# Altium PCB PCB1.PcbDoc (part 2 of 3)
Units mm, origin at the board's own origin, x right, y up, seen from the top; angles counter-clockwise.
Board outline 44.87 x 32.17 mm, 6 copper layers (Top Side, Inner Layer 1(GND), Inner Layer 2, Inner Layer 3, Inner Layer 4(GND), Bottom Side), stack 1.618 mm thick; 40 components, 39 nets, 233 pads, 118 vias.
Unrouted connection lines stored in the file: 1.
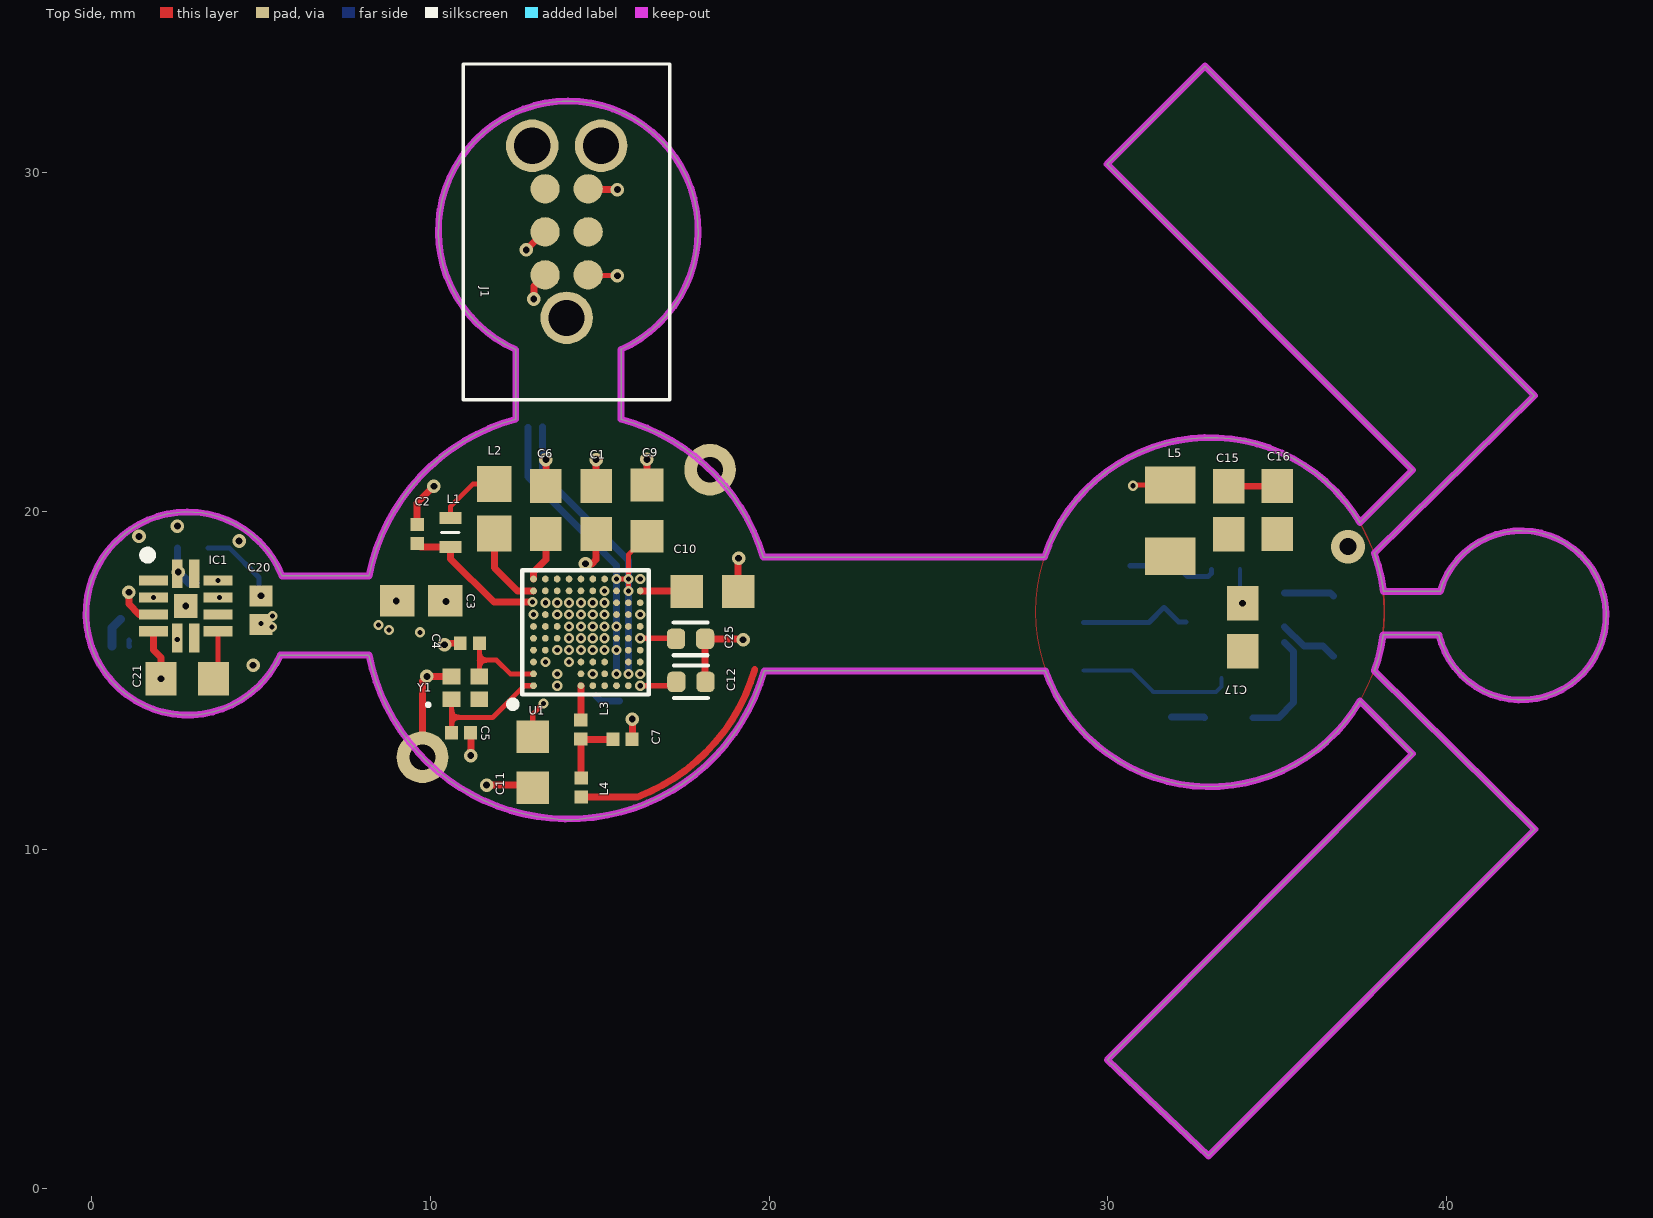
[diagram p0: Top Side view]

## Part data (continued)
L1: library part LQG15HN15NJ02D, "Inductor RF Chip Multi-Layer 15nH 5% 100MHz 8Q-Factor Air 300mA 460mOhm DCR 0402 Paper T/R", Case Code (Imperial)=0402, Case Code (Metric)=1005, Current Rating=300mA, DC Resistance (DCR)=460mR, Inductance Tolerance=5%, Manufacturer=Murata, Max Operating Temperature=125°C, Min Operating Temperature=-55°C, Package Quantity=1, Self Resonant Frequency=2.3GHz, Test Frequency=100MHz, Case/Package=0402, Category="Fixed Inductors", ComponentLink1Description=https://datasheet.ciiva.com/11801/0900766b80f10808-11801397.pdf?src-supplier=RSComponents, ComponentLink1URL=https://datasheet.ciiva.com/11801/0900766b80f10808-11801397.pdf?src-supplier=RSComponents, ComponentLink2Description=https://datasheet.ciiva.com/29696/l0075s0083lqg15hn-29696703.pdf?src-supplier=Digi-Key, ComponentLink2URL=https://datasheet.ciiva.com/29696/l0075s0083lqg15hn-29696703.pdf?src-supplier=Digi-Key, ComponentLink3Description=https://datasheet.ciiva.com/17277/l0075s0083lqg15hn-17277465.pdf?src-supplier=Avnet+Europe, ComponentLink3URL=https://datasheet.ciiva.com/17277/l0075s0083lqg15hn-17277465.pdf?src-supplier=Avnet+Europe, ComponentLink4Description=https://datasheet.ciiva.com/8002/66026-8002488.pdf?src-supplier=Element14, ComponentLink4URL=https://datasheet.ciiva.com/8002/66026-8002488.pdf?src-supplier=Element14, ComponentLink5Description=https://datasheet.ciiva.com/1063/l0075s0083lqg15hn-1063850.pdf?src-supplier=Digi-Key, ComponentLink5URL=https://datasheet.ciiva.com/1063/l0075s0083lqg15hn-1063850.pdf?src-supplier=Digi-Key, ComponentLink6Description=https://datasheet.ciiva.com/29696/l0075s0083lqg15hn-29696702.pdf?src-supplier=Digi-Key, ComponentLink6URL=https://datasheet.ciiva.com/29696/l0075s0083lqg15hn-29696702.pdf?src-supplier=Digi-Key, Core Material=Air, DC Current=300mA, Depth=0.55mm, Height=0.5mm, Height - Seated (Max)=0.022inch, Inductance=15nH, Lead Free="Lead Free", Length=0.039inch, Manufacturer Part Number=LQG15HN15NJ02D, Max DC Current=300mA, Military Standard=Not, Mount="Surface Mount", Packaging="Tape and Reel", Pricing 1="1=0.10000, 10=0.05500, 25=0.04920, 50=0.04180, 100=0.03690, 250=0.03380, 500=0.03072, 1000=0.02580, 2500=0.02211 (USD)", Q Factor=8, Radiation Hardening=No, REACH SVHC="No SVHC", RoHS=Yes, Shielding=Unshielded, Stock 1=62568, Supplier 1=Digi-Key, Termination=SMD/SMT, Tolerance=5%, Width=0.5mm
L2: library part LBMF1608T100K, "Inductor Chip Wirewound 10uH 10% 2.52MHz Ferrite 80mA 468mOhm DCR 0603 T/R", Case Code (Imperial)=0603, Case Code (Metric)=1608, Current Rating=80mA, DC Resistance (DCR)=360mR, Inductance Tolerance=10%, Manufacturer="Taiyo Yuden", Max Operating Temperature=105°C, Min Operating Temperature=-40°C, Package Quantity=3000, Resistor Type=Wirewound, Self Resonant Frequency=32MHz, Test Frequency=2.52MHz, Case/Package=0603, Category="Fixed Inductors", ComponentLink1Description=https://datasheet.ciiva.com/8504/lbmf1608t100k-ss-8504740.pdf?src-supplier=Avnet, ComponentLink1URL=https://datasheet.ciiva.com/8504/lbmf1608t100k-ss-8504740.pdf?src-supplier=Avnet, ComponentLink2Description=https://datasheet.ciiva.com/26872/getdatasheetpartid-637440-26872437.pdf?src-supplier=Verical, ComponentLink2URL=https://datasheet.ciiva.com/26872/getdatasheetpartid-637440-26872437.pdf?src-supplier=Verical, ComponentLink3Description=https://datasheet.ciiva.com/1040/lbmf1608t100k-ss-1040360.pdf?src-supplier=Digi-Key, ComponentLink3URL=https://datasheet.ciiva.com/1040/lbmf1608t100k-ss-1040360.pdf?src-supplier=Digi-Key, ComponentLink4Description=https://datasheet.ciiva.com/15986/610lbmf1608t100k-15986589.pdf?src-supplier=Onlinecomponents.com, ComponentLink4URL=https://datasheet.ciiva.com/15986/610lbmf1608t100k-15986589.pdf?src-supplier=Onlinecomponents.com, ComponentLink5Description=https://datasheet.ciiva.com/46395/1497259-46395174.pdf?src-supplier=Element14, ComponentLink5URL=https://datasheet.ciiva.com/46395/1497259-46395174.pdf?src-supplier=Element14, Core Material=Ferrite, DC Current=80mA, Depth=0.9mm, Halogen Free="Halogen Free", Height=0.35mm, Height - Seated (Max)=0.039inch, Inductance=10uH, Lead Free="Lead Free", Lead Pitch=0.7mm, Length=0.063inch, Manufacturer Part Number=LBMF1608T100K, Max DC Current=80mA, Military Standard=Not, Mount="Surface Mount", Packaging="Tape and Reel", Pricing 1="1=0.25000, 10=0.22300, 25=0.19800, 50=0.16840, 100=0.14850, 250=0.13612, 500=0.12376, 1000=0.10395 (USD)", Radiation Hardening=No, REACH SVHC=Unknown, RoHS=Yes, RoHS Compliant=Yes, Series=LB, Shielding=Unshielded, Stock 1=5221, Supplier 1=Digi-Key, Termination=SMD/SMT, Tolerance=10%, Weight=7.1E-05oz, Width=0.031inch
L3: library part LQP03TN3N9B02D, "Inductor RF Chip Thin Film 3.9nH 0.1nH 500MHz 14Q-Factor 400mA 300mOhm DCR 0201 Paper T/R", Case Code (Imperial)=0201, Case Code (Metric)=0603, Current=250mA, Current Rating=400mA, DC Resistance (DCR)=300mR, Manufacturer=Murata, Max Operating Temperature=125°C, Min Operating Temperature=-55°C, Package Quantity=15000, Resistor Type="Thin Film", Self Resonant Frequency=5.7GHz, Test Frequency=500MHz, Tolerance=3%, Case/Package=0201, Category="Fixed Inductors", ComponentLink1Description=https://datasheet.ciiva.com/16444/l0075s0084lqp03tn-02-16444482.pdf?src-supplier=Future+Electronics, ComponentLink1URL=https://datasheet.ciiva.com/16444/l0075s0084lqp03tn-02-16444482.pdf?src-supplier=Future+Electronics, Core Material=Non-Magnetic, DC Current=400mA, Depth=0.33mm, Height=0.3mm, Height - Seated (Max)=0.013inch, Inductance=3.9nH, Lead Free="Lead Free", Length=0.6mm, Manufacturer Part Number=LQP03TN3N9B02D, Max DC Current=400mA, Military Standard=Not, Mount="Surface Mount", Packaging="Tape and Reel", Pricing 1="1=0.10000, 10=0.04700, 25=0.04240, 50=0.03780, 100=0.03210, 250=0.02836, 500=0.02598, 1000=0.02221, 2500=0.01984 (USD)", Q Factor=14, Radiation Hardening=No, REACH SVHC="No SVHC", RoHS=Yes, Shielding=Unshielded, Stock 1=117865, Supplier 1=Digi-Key, Termination=SMD/SMT, Width=0.012inch
L4: library part LQP03TN4N7H02D, "Inductor RF Chip Thin Film 4.7nH 3% 500MHz 14Q-Factor 350mA 400mOhm DCR 0201 Paper T/R", Case Code (Imperial)=0201, Case Code (Metric)=0603, Current Rating=350mA, DC Resistance (DCR)=400mR, Manufacturer=Murata, Max Operating Temperature=125°C, Min Operating Temperature=-55°C, Package=None, Package Quantity=15000, Resistor Type="Thin Film", Self Resonant Frequency=4.4GHz, Test Frequency=500MHz, Tolerance=3%, Availability=Unavailable, Case/Package=0201, Category="Fixed Inductors", ComponentLink1Description=https://datasheet.ciiva.com/4982/s0084e-125392-4982064.pdf?src-supplier=Mouser, ComponentLink1URL=https://datasheet.ciiva.com/4982/s0084e-125392-4982064.pdf?src-supplier=Mouser, ComponentLink2Description=https://datasheet.ciiva.com/3865/lqp03tn4n7h0223-3865631.pdf?src-supplier=Arrow+Electronics, ComponentLink2URL=https://datasheet.ciiva.com/3865/lqp03tn4n7h0223-3865631.pdf?src-supplier=Arrow+Electronics, ComponentLink3Description=https://datasheet.ciiva.com/29698/s0084e-29698453.pdf?src-supplier=Digi-Key, ComponentLink3URL=https://datasheet.ciiva.com/29698/s0084e-29698453.pdf?src-supplier=Digi-Key, ComponentLink4Description=https://datasheet.ciiva.com/29698/s0084e-29698454.pdf?src-supplier=Digi-Key, ComponentLink4URL=https://datasheet.ciiva.com/29698/s0084e-29698454.pdf?src-supplier=Digi-Key, Core Material=Non-Magnetic, DC Current=350mA, Depth=0.33mm, Height=0.3mm, Height - Seated (Max)=0.013inch, Inductance=4.7nH, Lead Free="Lead Free", Length=0.024inch, Manufacturer Part Number=LQP03TN4N7H02D, Max DC Current=350mA, MF="{'manufacturer': u'Murata'}", Military Standard=Not, Mount="Surface Mount", Packaging="Tape and Reel", Price=None, Pricing 1="1=0.10000, 10=0.04700, 25=0.04240, 50=0.03780, 100=0.03210, 250=0.02836, 500=0.02598, 1000=0.02221, 2500=0.01984 (USD)", Q Factor=14, Radiation Hardening=No, RoHS=Yes, RoHS Compliant=Yes, Series=LQP03TN_02, Shielding=Unshielded, Stock 1=240787, Supplier 1=Digi-Key, Technology="THIN FILM", Termination=SMD/SMT, Width=0.3mm
L5: library part B82498F1472J000, "FIXED IND 4.7UH 90MA 3.8 OHM SMD", Case Code (Imperial)=0805, Case Code (Metric)=2012, Current Rating=90mA, DC Resistance (DCR)=3.8R, Inductance Tolerance=5%, Inductor Type="HIGH FREQUENCY", Manufacturer="TDK EPCOS", Self Resonant Frequency=210MHz, Test Frequency=7.96MHz, Case/Package=0805, Category="Fixed Inductors", ComponentLink1Description=https://datasheet.ciiva.com/6007/78409-6007765.pdf?src-supplier=Farnell, ComponentLink1URL=https://datasheet.ciiva.com/6007/78409-6007765.pdf?src-supplier=Farnell, ComponentLink2Description=https://datasheet.ciiva.com/14124/pjb82498f-data-en-14124805.pdf?src-supplier=Distrelec, ComponentLink2URL=https://datasheet.ciiva.com/14124/pjb82498f-data-en-14124805.pdf?src-supplier=Distrelec, Contact Plating=Silver, Core Material=Ferrite,Ceramic, DC Current=90mA, Depth=1.7mm, Inductance=4.7uH, Length=2.3mm, Manufacturer Part Number=B82498F1472J000, Max DC Current=90mA, Military Standard=Not, Mount="Surface Mount", Number of Pins=2, Packaging="Tape and Reel", Pricing 1="10=0.93100, 50=0.79000, 100=0.69900, 250=0.60400, 500=0.55800 (USD)", Q Factor=20, REACH SVHC="No SVHC", RoHS=Yes, RoHS Compliant=Yes, Series=SIMID, Series Resistance=3.8R, Stock 1=1, Supplier 1=RSComponents, Tolerance=5%
L6: library part AISC-0805F-470G-T, "Inductor RF Wirewound 47uH 2% 2.5MHz 10Q-Factor Ferrite 0.055A 13.8Ohm DCR 0805 T/R", Case Code (Imperial)=0805, Case Code (Metric)=2012, Current Rating=55mA, DC Resistance (DCR)=13.8R, Manufacturer=Abracon, Max DC Current=1A, Max Operating Temperature=125°C, Min Operating Temperature=-40°C, Package Quantity=2000, Self Resonant Frequency=14MHz, Test Frequency=2.5MHz, Tolerance=2%, Case/Package=0805, Category="Fixed Inductors", ComponentLink1Description=https://datasheet.ciiva.com/1079/aisc-0805f-1079476.pdf?src-supplier=Digi-Key, ComponentLink1URL=https://datasheet.ciiva.com/1079/aisc-0805f-1079476.pdf?src-supplier=Digi-Key, ComponentLink2Description=https://datasheet.ciiva.com/1079/aisc-0805f-1079477.pdf?src-supplier=Digi-Key, ComponentLink2URL=https://datasheet.ciiva.com/1079/aisc-0805f-1079477.pdf?src-supplier=Digi-Key, Core Material=Ferrite, Height=0.061inch, Inductance=47uH, Length=0.09inch, Manufacturer Part Number=AISC-0805F-470G-T, Mount="Surface Mount", Packaging="Tape and Reel", Pricing 1="1=0.29000, 10=0.25700, 25=0.22520, 50=0.19300, 100=0.17690, 250=0.16080, 500=0.15116, 1000=0.11578 (USD)", Q Factor=10, RoHS=Yes, RoHS Compliant=Yes, Series=AISC-0805F, Shielding=Unshielded, Stock 1=1780, Supplier 1=Digi-Key, Termination=SMD/SMT, Width=0.068inch
U1: "Multi-protocol Bluetooth Low Energy, IEEE 802.15.4, ANT and 2.4GHz proprietary system-on-chip", Manufacturer="Nordic Semiconductor", Manufacturer Part Number=nRF52840-CKAAD0, Footprint Doc=WLCSP-94, LatestRevisionDate=2018-12-17, Part Number=nRF52840-CKAAD0, Pin Count=94, Published=2018-12-17, Publisher="Nordic Semiconductor"
U2: library part SS8400-Legacy
U3: library part LM20DD9, "Ultra-low current 2.4 V precision analog temperature sensor", Manufacturer=STMicroelectronics, Max Operating Temperature=85°C, Max Supply Voltage=5.5V, Min Operating Temperature=-40°C, Min Supply Voltage=2.4V, Nominal Supply Current=8uA, Output Current=10mA, Output Voltage=1.864V, Package Quantity=1, Category="Temperature and Humidity Sensors", ComponentLink1Description=https://datasheet.ciiva.com/5299/cd00119601-113824-5299651.pdf?src-supplier=Mouser, ComponentLink1URL=https://datasheet.ciiva.com/5299/cd00119601-113824-5299651.pdf?src-supplier=Mouser, ComponentLink2Description=https://datasheet.ciiva.com/15098/getdatasheetpartid-130260-15098244.pdf?src-supplier=Verical, ComponentLink2URL=https://datasheet.ciiva.com/15098/getdatasheetpartid-130260-15098244.pdf?src-supplier=Verical, ComponentLink3Description=https://datasheet.ciiva.com/2847/cd00119601-2847250.pdf?src-supplier=Digi-Key, ComponentLink3URL=https://datasheet.ciiva.com/2847/cd00119601-2847250.pdf?src-supplier=Digi-Key, ComponentLink4Description=https://datasheet.ciiva.com/2847/cd00119601-2847251.pdf?src-supplier=Digi-Key, ComponentLink4URL=https://datasheet.ciiva.com/2847/cd00119601-2847251.pdf?src-supplier=Digi-Key, ComponentLink5Description=https://datasheet.ciiva.com/2847/cd00119601-2847252.pdf?src-supplier=Digi-Key, ComponentLink5URL=https://datasheet.ciiva.com/2847/cd00119601-2847252.pdf?src-supplier=Digi-Key, ComponentLink6Description=https://datasheet.ciiva.com/22623/1455553-22623973.pdf?src-supplier=Farnell, ComponentLink6URL=https://datasheet.ciiva.com/22623/1455553-22623973.pdf?src-supplier=Farnell, ComponentLink7Description=https://datasheet.ciiva.com/3279/cd00119601-3279974.pdf?src-supplier=Avnet, ComponentLink7URL=https://datasheet.ciiva.com/3279/cd00119601-3279974.pdf?src-supplier=Avnet, Height=0.48mm, Lead Free="Lead Free", Length=1.3mm, Manufacturer Part Number=STLM20DD9F, Max Supply Voltage (DC)=5.5V, Min Supply Voltage (DC)=2.4V, Mount="Surface Mount", Number of Pins=4, Operating Supply Current=8uA, Output Type="Analog Voltage,Analog", Packaging="Tape and Reel", Pricing 1="1=0.86000, 10=0.75800, 25=0.71240, 100=0.58150, 500=0.45968, 1000=0.38308 (USD)", Radiation Hardening=No, REACH SVHC="No SVHC", RoHS=Yes, RoHS Compliant=Yes, Series=STLM20, Stock 1=14696, Supplier 1=Digi-Key, Supply Current=8uA, Termination=SMD/SMT, Width=1mm
U5: "AP7340 Series 3.3 V Fixed Output 150 mA SMT LDO Regulator - DFN1010-4", Case/Package=DFN, Dropout Voltage=210mV, Manufacturer=Diodes, Max Input Voltage=5.25V, Max Operating Temperature=85°C, Max Output Current=150mA, Max Power Dissipation=400mW, Min Input Voltage=1.7V, Min Operating Temperature=-40°C, Output Voltage=3.3V, Package Quantity=5000, Quiescent Current=50uA, Accuracy=1%, Category="Voltage Regulators - Linear", ComponentLink1Description=https://datasheet.ciiva.com/29568/ap7340-29568831.pdf?src-supplier=Digi-Key, ComponentLink1URL=https://datasheet.ciiva.com/29568/ap7340-29568831.pdf?src-supplier=Digi-Key, ComponentLink2Description=https://datasheet.ciiva.com/30016/ap7340-30016698.pdf?src-supplier=Avnet, ComponentLink2URL=https://datasheet.ciiva.com/30016/ap7340-30016698.pdf?src-supplier=Avnet, Contact Plating=Gold, Height=0.35mm, Lead Free="Lead Free", Length=1.05mm, Manufacturer Part Number=AP7340-33FS4-7, Mount="Surface Mount", Number Of Outputs=1, Number of Pins=4, Number of Regulators=1, Output Current=150mA, Output Type=Fixed, Packaging="Tape and Reel", Polarity=Positive, Power Rating=400mW, Pricing 1="1=0.39000, 10=0.31400, 25=0.28720, 100=0.21370, 250=0.19368, 500=0.16028, 1000=0.12020, 2500=0.11019 (USD)", RoHS=Yes, RoHS Compliant=Yes, Stock 1=94687, Supplier 1=Digi-Key, Width=1.05mm
Y1: library part ECS-320-10-48-CKY-TR, "Crystal 32MHz ±10ppm (Tol) ±10ppm (Stability) 10pF 100Ohm 4-Pin Ultra Mini-CSMD T/R", Manufacturer="ECS International", ComponentLink1Description=https://www.ecsxtal.com/store/pdf/ECX-1048.pdf?src-supplier=Digi-Key, ComponentLink1URL=https://www.ecsxtal.com/store/pdf/ECX-1048.pdf?src-supplier=Digi-Key, Manufacturer Part Number=ECS-320-10-48-CKY-TR, Pricing 1="1=1.27000, 10=1.20000, 50=1.20000, 100=1.03000, 500=0.99300, 1000=0.83700, 3000=0.82100, 10000=0.82100 (USD)", RoHS=Yes, Stock 1=7614, Supplier 1=Mouser

## Free pads (board coordinates)
  round 1.524 hole 0.762 mask+0.102: 4(9.766,12.733)
  round 1.524 hole 0.762 paste+0: 4(18.255,21.222)

## Via types
v1: diameter 0.3, hole 0.15, Top Side to Inner Layer 1(GND), 24 vias
v2: diameter 0.4, hole 0.2, Top Side to Inner Layer 1(GND), tented both sides, 13 vias
v3: diameter 0.3, hole 0.15, Inner Layer 4(GND) to Bottom Side, tented both sides, 10 vias
v4: diameter 0.4, hole 0.2, Top Side to Bottom Side, tented both sides, 8 vias
v5: diameter 0.3, hole 0.15, Top Side to Inner Layer 3, 8 vias
v6: diameter 0.3, hole 0.15, Top Side to Inner Layer 2, 8 vias
v7: diameter 0.3/0.3 (per signal layer), hole 0.15, Top Side to Inner Layer 2, 6 vias
v8: diameter 0.4, hole 0.2, Inner Layer 4(GND) to Bottom Side, 6 vias
v9: diameter 0.3, hole 0.15, Top Side to Inner Layer 2, tented both sides, 5 vias
v10: diameter 0.3, hole 0.15, Inner Layer 2 to Bottom Side, tented both sides, 4 vias
v11: diameter 0.4, hole 0.2, Top Side to Inner Layer 1(GND), 3 vias
v12: diameter 0.3, hole 0.15, Inner Layer 3 to Bottom Side, tented both sides, 3 vias
v13: diameter 0.4/0.4 (per signal layer), hole 0.2, Top Side to Inner Layer 2, tented both sides, 3 vias
v14: diameter 0.3, hole 0.15, Top Side to Bottom Side, tented both sides, 2 vias
v15: diameter 0.3, hole 0.15, Top Side to Bottom Side, 2 vias
v16: diameter 0.4, hole 0.2, Inner Layer 3 to Bottom Side, tented both sides, 2 vias
v17: diameter 0.4, hole 0.2, Inner Layer 2 to Bottom Side, 2 vias
v18: diameter 0.3, hole 0.15, Top Side to Inner Layer 3, tented both sides, 1 vias
v19: diameter 0.762, hole 0.254, Inner Layer 2 to Inner Layer 3, 1 vias
v20: diameter 1, hole 0.5, Top Side to Bottom Side, tented both sides, 1 vias
v21: diameter 1, hole 0.5, Inner Layer 2 to Bottom Side, tented both sides, 1 vias
v22: diameter 0.4/0.4 (per signal layer), hole 0.2, Inner Layer 3 to Bottom Side, 1 vias
v23: diameter 0.3, hole 0.15, Inner Layer 4(GND) to Bottom Side, 1 vias
v24: diameter 0.4, hole 0.2, Inner Layer 4(GND) to Bottom Side, tented both sides, 1 vias
v25: diameter 0.3/0.3 (per signal layer), hole 0.15, Top Side to Inner Layer 2, tented both sides, 1 vias
v26: diameter 0.4, hole 0.2, Top Side to Inner Layer 3, 1 vias

## Nets (pads, with @x,y where several pads share a name; then routed paths per layer and width w, separated by ;. In a path a pad name is that pad's centre, name@x,y a point inside that pad or via, vN(x,y) a via of type N, cw(c..) or ccw(c..) an arc to the next point about the centre after c; other vN are vias at no path point)
3V3: C9.2 C11.2 C12.1 C13.1 C14.2 C24.2 C25.1 C26.2 J1.1 L5.1 U1.B3 U1.H10 U1.J9 U1.J10 U1.K1 U1.K5 U2.4 U5.1 | length 10.8
  Top Side w0.15: C11.2 13.021,14 v25(13.338,14.317) ; J1.1 14.681,26.949 v13(15.519,26.949) ; v6(15.493,17.995) v7(15.843,17.995) ; v7(15.843,17.645) v7(15.843,17.995) ; v7(16.193,14.845) 17.145,14.845 C12.1 ; v7(16.193,16.245) 17.233,16.245 C25.1 ; C9.2 15.843,18.712 v7(15.843,17.995) ; v7(30.743,20.749) 30.761,20.767 L5.1
  Bottom Side w0.15: C14.2 C13.1 31.211,16.713 v22(31.656,17.158) 32.087,16.728 U2.4
  other v15: 13.393,15.545
  other v16: 4.941,16.795 3.425,19.533
Antenna: L4.2 | length 7
  Top Side w0.203: L4.2 16.092,11.555 ccw(c14.075,16.914) 19.574,15.322
B57153S0150M000: IC1.1
GND: C1.1 C2.1 C3.2 C4.2 C5.1 C6.2 C7.1 C8.1 C9.1 C10.1 C11.1 C12.2 C18.2 C19.2 C20.1 C21.1 C22.2 C23.1 C25.2 C26.1 IC1.4 IC1.13 IC2.2 IC2.5 J1.5 J1.7 J1.8 J1.9 pad.4@9.766,12.733 U1.B7 U1.C1 U1.C4 U1.D3 U1.D4 U1.D5 U1.D6 U1.D7 U1.D8 U1.E4 U1.E5 U1.E6 U1.E7 U1.E8 U1.F4 U1.F5 U1.F6 U1.F7 U1.F8 U1.G4 U1.G5 U1.G6 U1.G7 U1.G8 U1.K10 U2.1 U2.5 U2.6 U2.7 U2.20 U2.21 U2.26 U2.30 U3.2 U3.3 U5.5 Y1.4 | length 18.8
  Top Side w0.203: IC1.4 1.826,15.9 2.05,15.675 v11(2.05,15.048) ; C2.1 9.607,20.238 v2(10.103,20.734) ; pad.4@9.766,12.733 9.766,14.988 v2(9.897,15.118) 9.9,15.115 Y1.4 ; v2(10.415,16.053) 10.444,16.053 10.49,16.099 C4.2 ; C5.1 11.192,13.455 v2(11.192,12.781) ; v2(11.659,11.913) 12.942,11.913 C11.1 ; C6.2 13.37,20.78 13.41,20.82 v2(13.41,21.52) ; J1.5 14.681,29.489 v2(15.519,29.489) ; C1.1 14.866,20.764 14.891,20.789 v2(14.891,21.52) ; C7.1 15.96,13.266 v2(15.96,13.861) ; C9.1 v2(16.391,21.526) ; C12.2 18.109,14.972 C25.2 19.204,16.229 v2(19.228,16.205) ; C10.1 19.08,18.588 v2(19.097,18.605)
  Top Side w0.254: C21.1@1.826,15.273 v11(2.05,15.048)
  Bottom Side w0.203: C8.1 15.042,14.395 v24(15.586,14.395) ; v23(31.871,13.923) 32.831,13.923 C18.2
  Bottom Side w0.254: IC2.2 0.6,16.556 v8(0.85,16.806)
  other v1: 13.743,14.845 14.093,15.545 13.743,15.895 14.093,15.895 14.443,15.895 14.793,15.895 15.143,15.895 14.093,16.245 14.443,16.245 14.793,16.245 15.143,16.245 14.093,16.595 14.443,16.595 14.793,16.595 15.143,16.595 14.093,16.945 14.443,16.945 14.793,16.945 15.143,16.945 14.093,17.295 14.443,17.295 14.793,17.295 15.143,17.295 16.193,17.995
  other v2: 8.99,17.348
  other v3: 32.294,15.906 32.3,16.185 32.3,16.447 35.215,16.835 35.215,17.085 29.345,17.837 30.645,17.837 32.3,17.835 33.352,18.281 34.404,18.281
  other v5: 13.743,14.845
  other v8: 13.491,16.387 2.601,16.768 3.941,17.882 1.397,18.691 2.98,19.232
  other v11: 2.776,17.201 5,17.5
NetC1_2: C1.2 C2.2 L1.1 U1.A8 U1.C2 | length 11.1
  Top Side w0.203: C2.2 9.704,18.943 L1.1 10.588,18.59 10.594,18.59 11.872,17.312 v7(13.013,17.312) ; v4(14.578,18.442) 14.768,18.442 14.891,18.565 C1.2
  Inner Layer 3 w0.203: v5(13.743,15.195) 14.578,16.03 14.578,17.42 v4(14.578,18.442)
  Inner Layer 2 w0.203: v7(13.013,17.312) 14.143,18.442 v4(14.578,18.442)
NetC3_1: C3.1 U1.B8 | length 3
  Top Side w0.15: C3.1 v26(10.456,17.329)
  Inner Layer 3 w0.15: v26(10.456,17.329) 13.359,17.329 v5(13.393,17.295)
  Inner Layer 2 w0.15: v5@13.359,17.329 v5(13.393,17.295)
NetC4_1: C4.1 U1.A2 Y1.3 | length 2.8
  Top Side w0.15: Y1.3 11.443,15.6 ; C4.1 11.443,15.6 ; U1.A2 12.358,15.195 11.953,15.6 11.443,15.6
NetC5_2: C5.2 U1.A1 Y1.1 | length 3.8
  Top Side w0.15: C5.2 10.623,13.91 ; Y1.1 10.623,13.91 ; U1.A1 12.773,14.845 11.838,13.91 10.623,13.91
NetC6_1: C6.1 U1.A10 | length 1.5
  Top Side w0.203: U1.A10 13.043,18.197 13.41,18.565 C6.1
NetC7_2: C7.2 L3.2 L4.1 | length 2.1
  Top Side w0.203: L4.1 14.443,12.121 L3.2 14.456,13.259 C7.2
NetC8_2: C8.2 U1.F2
  other v15: 14.793,15.195
NetC10_2: C10.2 U1.K9 | length 1.4
  Top Side w0.203: U1.K9 17.546,17.645 C10.2
NetC17_1: C17.1 U2.28 | length 1
  Bottom Side w0.125: U2.28 33.902,17.352 v4(33.973,17.281)
NetC18_1: C18.1 U2.18 | length 3.3
  Bottom Side w0.203: C18.1 35.029,13.899 35.477,14.346 35.477,15.856 U2.18
NetC21_2: C21.2 IC1.7 | length 1.5
  Top Side w0.15: C21.2 3.726,15.174 IC1.7
NetC24_1: C24.1 U5.2 | length 2.6
  Bottom Side w0.15: U5.2 4.073,18.907 4.941,18.039 C24.1
NetL1_2: L1.2 L2.1 | length 1.9
  Top Side w0.15: L1.2 10.588,20.13 11.252,20.794 L2.1
NetL2_2: L2.2 U1.A9 | length 2.4
  Top Side w0.203: L2.2 11.887,18.327 12.569,17.645 U1.A9
NetL3_1: L3.1 U1.E1 | length 1
  Top Side w0.203: L3.1 U1.E1
NetL6_1: L6.1 U2.23 | length 1.5
  Bottom Side w0.203: U2.23 36.563,17.585 L6.1
NetU2_31: U2.31 U3.1 | length 2.7
  Bottom Side w0.15: U3.1 32.029,18.387 32.352,18.064 32.952,18.064 33.052,18.165 U2.31
P0.29/AIN5: IC1.10 U1.C7 | length 10.7
  Inner Layer 3 w0.203: v5(3.726,17.951) 3.895,17.782 5.583,17.782 5.621,17.782 ; 8.186,17.782 13.343,17.782 13.743,17.383 v5(13.743,16.945)
  Inner Layer 3 w0.254: 5.621,17.782 8.185,17.782
P0.30/AIN6: IC1.9 U1.A7 | length 9.5
  Inner Layer 2 w0.203: v6@3.726,17.451 4.685,17.451 5.583,17.451 5.621,17.451 ; 8.186,17.451 9.726,17.451 10.232,16.945 v6(13.043,16.945)
  Inner Layer 2 w0.254: 5.621,17.451 8.185,17.451
  other v6: 3.776,17.451
P0.31/AIN7: IC1.5 U1.C8 | length 11.7
  Inner Layer 3 w0.15: v5(2.525,16.204) 5.583,16.204 5.621,16.204 8.185,16.204 ; 8.186,16.204 9.47,16.204 v18(9.687,16.422)
  Inner Layer 2 w0.15: v18(9.687,16.422) 9.707,16.403 12.85,16.403 v6(13.743,17.295)
P1.08: IC1.2 U1.G9 | length 14.6
  Inner Layer 2 w0.15: v6(1.826,17.451) 2.981,17.451 4.38,16.053 5.583,16.053 5.621,16.053 8.185,16.053 ; 8.186,16.053 13.55,16.053 v6(15.143,17.645)
PBEN: IC1.3 IC2.4 | length 1.2
  Top Side w0.203: v4(1.1,17.606) 1.1,17.252 1.401,16.951 IC1.3
RING1: L6.2 U2.19 | length 41.6
  Inner Layer 2 w0.125: v21(36.655,15.714) 37.656,16.715 40.773,16.715 40.773,16.931 40.782,17.175 40.917,17.644 41.168,18.06 41.516,18.395 41.937,18.626 42.401,18.741 42.877,18.732 43.331,18.6 43.734,18.357 44.058,18.019 44.282,17.611 44.393,17.162 44.383,16.701 44.256,16.261 44.02,15.872 43.693,15.558 43.298,15.341 42.863,15.234 42.417,15.244 41.992,15.368 41.615,15.596 41.312,15.912 41.103,16.294 41,16.715 41.009,17.146 41.129,17.557 41.35,17.92 41.656,18.213 42.025,18.415 42.431,18.514 42.847,18.504 43.243,18.388 43.594,18.175 43.876,17.88 44.071,17.524 44.166,17.132 44.156,16.731 44.044,16.349 43.838,16.011 43.553,15.74 43.21,15.553 42.833,15.461 42.447,15.471 42.08,15.579 41.755,15.778 41.494,16.052 41.314,16.382 41.227,16.745 41.236,17.116 41.341,17.469 41.532,17.781 41.795,18.031 42.112,18.203 42.461,18.287 42.817,18.277 43.156,18.177 43.455,17.993 43.694,17.74 43.859,17.436 43.939,17.102 43.929,16.761 43.833,16.437 43.656,16.151 43.414,15.922 43.123,15.764 42.803,15.688 42.477,15.698 42.167,15.791 41.894,15.959 41.676,16.191 41.526,16.47 41.454,16.775 41.463,16.931 41.833,16.931
  Inner Layer 2 w0.203: v21(36.655,15.714) 36.738,15.714 40.551,11.9
  Inner Layer 2 w0.25: 41.833,16.931 42.204,16.931
  Bottom Side w0.203: U2.19 35.783,16.017 36.352,16.017 v21(36.655,15.714)
RP110_CE: C19.1 IC1.12 U5.3 | length 1.4
  Bottom Side w0.203: U5.3 2.53,18.224 v4(2.554,18.201)
  Bottom Side w0.254: v4(2.554,18.201) 2.873,17.882 C19.1 C19.1@3.067,17.882
SCS: U1.K2 U2.12 | length 18.4
  Inner Layer 2 w0.203: v6(16.193,15.195) 17.253,16.256 19.823,16.256 ; 28.127,16.256 28.154,16.256 32.462,16.256 v10(33.652,15.066)
  Inner Layer 2 w0.254: 19.852,16.256 28.127,16.256
SDIN: U1.H4 U2.9 | length 17.6
  Inner Layer 3 w0.203: v5(15.493,15.895) 19.823,15.895 19.852,15.895 ; 28.127,15.895 28.154,15.895 31.925,15.895 v12(32.754,15.066)
  Inner Layer 3 w0.254: 19.852,15.895 28.127,15.895
SDOUT: U1.H6 U2.16 | length 20
  Inner Layer 2 w0.203: v6(15.493,16.595) 19.823,16.595 ; 28.127,16.595 28.154,16.595 33.329,16.595 v10(34.859,15.066)
  Inner Layer 2 w0.254: 19.852,16.595 28.127,16.595
SENCOIL: U2.22
  other v12: 35.215,17.335
SGND: C13.2 C14.1 U2.11 | length 4.6
  Bottom Side w0.125: C14.1 C13.2 31.341,14.661 33.187,14.661 33.352,14.826 U2.11
SSCK: U1.K7 U2.10 | length 17.7
  Inner Layer 3 w0.203: v5(16.193,16.945) 19.823,16.945 ; 28.154,16.945 31.308,16.945 33.054,15.199 v12(33.054,15.066)
  Inner Layer 3 w0.254: 19.852,16.945 28.127,16.945 28.154,16.945
SVCC: C15.2 C16.1 C17.2 L5.2 U2.29 U3.4 | length 2.5
  Inner Layer 2 w0.203: v20(37.084,18.948) 37.363,18.948 38.938,20.523
SVEE: C15.1 C16.2 | length 1.4
  Top Side w0.203: C15.1 34.99,20.732 C16.2
SWDCLK: J1.4 U1.H2 | length 14.6
  Top Side w0.203: v13(12.827,27.711) 13.36,28.245 J1.4
  Inner Layer 2 w0.203: v13(12.827,27.711) 12.594,27.478 12.594,25.782 12.82,25.556 12.82,22.532 v10(12.877,22.475)
  Bottom Side w0.203: v10(12.877,22.475) 12.877,21.014 15.493,18.398 v14(15.493,15.195)
SWDIO: J1.2 U1.J2 | length 13.1
  Top Side w0.203: v13(13.052,26.26) 13.052,26.641 J1.2
  Inner Layer 2 w0.203: v13(13.052,26.26) 13.052,22.742 v10(13.305,22.49)
  Bottom Side w0.203: v10(13.305,22.49) 13.305,21.081 15.843,18.543 v14(15.843,15.195)
VBAT: C20.2 C22.1 C23.2 IC1.8 IC2.1 pad.4@18.255,21.222 U5.4 | length 0.2
  Bottom Side w0.15: v17(1.101,16.189) 1.101,16.167 1.109,16.159 1.1,16.15 IC2.1 IC2.1@1.113,16.006
  other v4: 4.764,15.45 4.352,19.117 1.397,19.251 2.53,19.557
  other v9: 8.773,16.486 5.321,16.58 8.466,16.637 5.003,16.684 5.333,16.898
  other v17: 1.095,15.655
pads on no net: IC1.6 IC1.11 IC2.3 J1.3 J1.6 U1.A3 U1.A4 U1.A5 U1.A6 U1.B4 U1.B5 U1.B6 U1.B9 U1.B10 U1.C5 U1.C6 U1.C9 U1.C10 U1.D9 U1.D10 U1.E2 U1.E3 U1.E9 U1.E10 U1.F1 U1.F3 U1.F9 U1.F10 U1.G1 U1.G2 U1.G3 U1.G10 U1.H1 U1.H5 U1.H7 U1.H8 U1.H9 U1.J1 U1.J3 U1.J4 U1.J5 U1.J6 U1.J7 U1.J8 U1.K3 U1.K4 U1.K6 U1.K8 U2.2 U2.3 U2.8 U2.13 U2.14 U2.15 U2.17 U2.24 U2.25 U2.27 U2.32 U2.33 Y1.2
copper on no net: | length 35.4
  Inner Layer 3 w0.125: 35.215,17.335 35.25,17.3 40.581,17.3 40.764,17.147 40.782,16.686 40.917,16.218 41.168,15.802 41.516,15.467 41.937,15.235 42.401,15.121 42.877,15.13 43.331,15.262 43.734,15.505 44.058,15.843 44.282,16.25 44.393,16.7 44.383,17.16 44.256,17.6 44.02,17.99 43.693,18.304 43.298,18.521 42.863,18.627 42.417,18.618 41.992,18.494 41.615,18.266 41.312,17.949 41.103,17.567 41,17.147 41.009,16.716 41.129,16.305 41.35,15.941 41.656,15.649 42.025,15.447 42.431,15.348 42.847,15.357 43.243,15.473 43.594,15.687 43.876,15.982 44.071,16.338 44.166,16.73 44.156,17.131 44.044,17.513 43.838,17.851 43.553,18.122 43.21,18.309 42.833,18.4 42.447,18.391 42.08,18.283 41.755,18.084 41.494,17.81 41.314,17.48 41.227,17.117 41.236,16.746 41.341,16.393 41.532,16.081 41.795,15.831 42.112,15.658 42.461,15.575 42.817,15.584 43.156,15.685 43.455,15.869 43.694,16.122 43.859,16.426 43.939,16.76 43.929,17.101 43.833,17.425 43.656,17.711 43.414,17.94 43.123,18.097 42.803,18.173 42.477,18.164 42.167,18.071 41.894,17.902 41.676,17.671 41.526,17.392 41.454,17.087 41.463,16.931 v19@41.833,16.931
  Inner Layer 3 w0.25: v19@41.833,16.931 v19@42.204,16.931
  other v19: 42.204,16.922

## Polygon pours and split planes (outlines as drawn)
VBAT on Bottom Side "NONET_L06_P011" (solid, shelved, pour order 11): 14.595,10.936 cw(c14.589,10.939) 14.591,10.933 cw(c14.599,10.926) 14.598,10.936 cw(c14.082,13.661) 13.548,10.94 cw(c13.536,10.905) 13.561,10.933 cw(c13.566,10.961) 13.551,10.936 cw(c13.549,10.937) 13.55,10.935 cw(c13.549,10.932) 13.551,10.933 cw(c14.075,16.914) 8.185,15.748 5.569,15.749 cw(c2.832,16.977) 5.619,18.085 8.186,18.085 cw(c14.074,16.914) 12.521,22.713 12.521,24.766 cw(c14.067,28.273) 15.625,24.771 15.628,24.771 15.628,22.713 cw(c14.075,16.915) 19.823,18.644 28.127,18.644 cw(c33.015,17.021) 37.438,19.66 37.866,18.762 cw(c33.09,17.028) 38.136,17.625 38.138,17.627 cw(c38.141,17.621) 38.136,17.625 cw(c32.816,17.05) 37.866,15.283 37.438,14.392 cw(c33.005,17.014) 28.155,15.283 19.852,15.283 cw(c14.075,16.913) 14.598,10.933 cw(c14.6,10.939)
SVCC on Bottom Side "NONET_L06_P001" (solid, shelved, pour order 1): 27.86,17.034 ccw(c33.01,17.034) 33.01,11.883 ccw(c33.01,17.034) 38.161,17.034 ccw(c33.01,17.034) 33.01,22.184 ccw(c33.01,17.034)
VBAT on Top Side "NONET_L01_P005" (solid, shelved, pour order 5): 14.595,10.936 cw(c14.589,10.939) 14.591,10.933 cw(c14.599,10.926) 14.598,10.936 cw(c14.082,13.661) 13.548,10.94 cw(c13.536,10.905) 13.561,10.933 cw(c13.566,10.961) 13.551,10.936 cw(c13.549,10.937) 13.55,10.935 cw(c13.549,10.932) 13.551,10.933 cw(c14.075,16.914) 8.185,15.748 5.569,15.749 cw(c2.832,16.977) 5.619,18.085 8.186,18.085 cw(c14.074,16.914) 12.521,22.713 12.521,24.766 cw(c14.067,28.273) 15.625,24.771 15.628,24.771 15.628,22.713 cw(c14.075,16.915) 19.823,18.644 28.127,18.644 cw(c33.015,17.021) 37.438,19.66 37.866,18.762 cw(c33.09,17.028) 38.136,17.625 38.138,17.627 cw(c38.141,17.621) 38.136,17.625 cw(c32.816,17.05) 37.866,15.283 37.438,14.392 cw(c33.005,17.014) 28.155,15.283 19.852,15.283 cw(c14.075,16.913) 14.598,10.933 cw(c14.6,10.939)
SVCC on Top Side "NONET_L01_P000" (solid, shelved, pour order 0): 27.86,17.034 ccw(c33.01,17.034) 33.01,11.883 ccw(c33.01,17.034) 38.161,17.034 ccw(c33.01,17.034) 33.01,22.184 ccw(c33.01,17.034)
3V3 on Inner Layer 3 "NONET_L04_P003" (solid, shelved, pour order 3): 14.595,10.936 cw(c14.589,10.939) 14.591,10.933 cw(c14.599,10.926) 14.598,10.936 cw(c14.082,13.661) 13.548,10.94 cw(c13.536,10.904) 13.561,10.933 cw(c13.566,10.961) 13.551,10.936 cw(c13.549,10.937) 13.55,10.935 cw(c13.549,10.932) 13.551,10.933 cw(c14.075,16.914) 8.185,15.748 5.569,15.749 cw(c2.832,16.977) 5.619,18.085 8.186,18.085 cw(c14.074,16.914) 12.521,22.713 12.521,24.766 cw(c14.067,28.273) 15.625,24.771 15.628,24.771 15.628,22.713 cw(c14.075,16.915) 19.823,18.644 28.127,18.644 cw(c33.015,17.021) 37.438,19.66 37.866,18.762 cw(c33.088,17.027) 38.136,17.625 38.138,17.627 38.136,17.625 38.138,17.622 38.138,16.343 38.12,16.343 cw(c33.079,16.989) 37.866,15.283 37.438,14.392 cw(c33.005,17.014) 28.155,15.283 19.852,15.283 cw(c14.075,16.913) 14.598,10.933 cw(c14.6,10.939)
VBAT on Inner Layer 2 "NONET_L03_P002" (solid, shelved, pour order 2): 4.415,17.074 4.742,17.074 9.058,17.074 9.058,16.204 4.415,16.204
RING1 on Inner Layer 2 "NONET_L03_P009" (solid, shelved, pour order 9): 37.438,14.392 38.994,12.836 29.985,3.8 32.951,0.951 42.607,10.607 42.542,10.607 37.866,15.283 37.652,14.838
SVCC on Inner Layer 2 "NONET_L03_P010" (solid, shelved, pour order 10): 37.438,19.66 38.994,21.216 29.969,30.241 32.864,33.136 42.593,23.407 37.866,18.762 37.651,19.211
3V3 on Inner Layer 2 "NONET_L03_P008" (solid, shelved, pour order 8): 14.595,10.936 cw(c14.589,10.939) 14.591,10.933 cw(c14.599,10.926) 14.598,10.936 cw(c14.082,13.661) 13.548,10.94 cw(c13.537,10.905) 13.561,10.933 cw(c13.566,10.961) 13.551,10.936 cw(c13.549,10.937) 13.55,10.935 cw(c13.549,10.932) 13.551,10.933 cw(c14.075,16.914) 8.185,15.748 5.569,15.749 cw(c2.832,16.977) 5.619,18.085 8.186,18.085 cw(c14.074,16.914) 12.521,22.713 12.521,24.766 cw(c14.067,28.273) 15.625,24.771 15.628,24.771 15.628,22.713 cw(c14.075,16.915) 19.823,18.644 28.127,18.644 cw(c33.015,17.021) 37.438,19.66 37.866,18.762 cw(c33.092,17.029) 38.136,17.624 cw(c38.135,17.624) 38.136,17.625 cw(c32.832,17.048) 37.866,15.283 37.438,14.392 cw(c33.005,17.014) 28.155,15.283 19.852,15.283 cw(c14.075,16.913) 14.598,10.933 cw(c14.6,10.939)
GND on Inner Layer 4(GND) (split plane): 41.868,23.41 39.479,21.062 39.495,21.116 39.505,21.216 39.495,21.316 39.466,21.411 39.419,21.5 39.355,21.577 30.691,30.241 32.864,32.414
GND on Inner Layer 4(GND) (split plane): 41.883,10.605 32.956,1.678 30.71,3.815 39.356,12.476 39.388,12.515 39.419,12.553 39.442,12.597 39.466,12.641 39.481,12.689 39.495,12.737 39.5,12.787 39.505,12.836 39.505,12.837 39.5,12.887 39.495,12.936 39.485,12.97
GND on Inner Layer 4(GND) (split plane): 699 vertices, not listed, extent 0.34,11.396 44.195,31.597
GND on Inner Layer 1(GND) (split plane): 41.868,23.41 39.479,21.062 39.495,21.116 39.505,21.216 39.495,21.316 39.466,21.411 39.419,21.5 39.355,21.577 30.691,30.241 32.864,32.414
GND on Inner Layer 1(GND) (split plane): 41.883,10.605 32.956,1.678 30.71,3.815 39.356,12.476 39.388,12.515 39.419,12.553 39.442,12.597 39.466,12.641 39.481,12.689 39.495,12.737 39.5,12.787 39.505,12.836 39.505,12.837 39.5,12.887 39.495,12.936 39.485,12.97
GND on Inner Layer 1(GND) (split plane): 699 vertices, not listed, extent 0.34,11.396 44.195,31.597

## Keep-outs
Keep-Out Layer:
  lines w0.2: 13.551,10.933 cw(c14.075,16.914) 8.185,15.748 5.569,15.749 cw(c2.832,16.977) 5.619,18.085 8.186,18.085 cw(c14.074,16.914) 12.521,22.713 12.521,24.766 cw(c14.067,28.273) 15.625,24.771 15.628,24.771 15.628,22.713 cw(c14.075,16.914) 19.823,18.644 28.127,18.644 cw(c33.015,17.021) 37.438,19.66 38.994,21.216 29.969,30.241 32.864,33.136 42.593,23.407 37.866,18.762 cw(c33.067,17.022) 38.136,17.625 38.138,17.627 39.802,17.627 39.805,17.626 cw(c42.204,16.922) 39.772,16.344 39.77,16.343 38.12,16.343 cw(c33.057,16.994) 37.866,15.283 42.607,10.607 32.965,0.965 29.985,3.8 30.035,3.861 38.994,12.836 37.438,14.392 cw(c33.005,17.014) 28.155,15.283 19.852,15.283 cw(c14.075,16.914) 13.565,10.932